# Altium PCB LED_module.PcbDoc
Units mm, origin at the board's own origin, x right, y up, seen from the top; angles counter-clockwise.
Board outline 16 x 15 mm, 2 copper layers (Top Layer, Bottom Layer); 17 components, 17 nets, 75 pads, 15 vias.
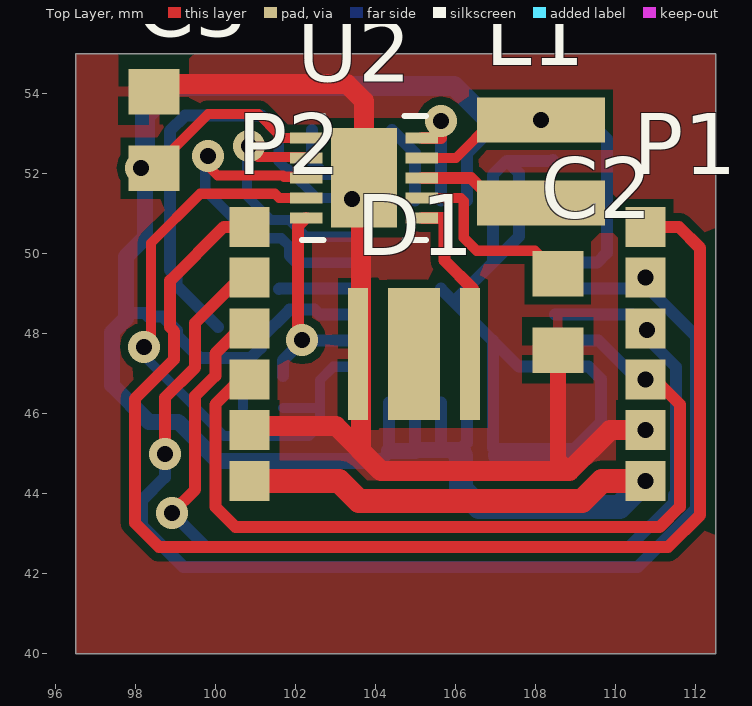
[diagram p0: Top Layer view]
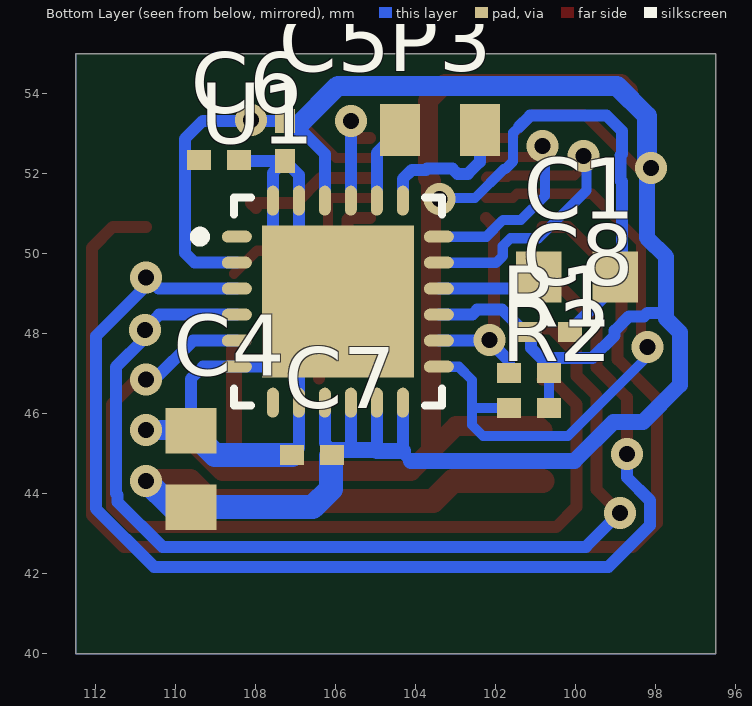
[diagram p1: Bottom Layer view, seen from below]

## Layer stack, top to bottom
Top Layer: signal copper 0.0356
Dielectric: dielectric 0.32, FR-4, Dk 4.8
Bottom Layer: signal copper 0.0356

## Board outline
96.5,55 112.5,55 112.5,40 96.5,40

## Design rules (kind name [scope] priority, off if disabled: settings)
Clearance [All] p1: gap=0.203
HoleSize [All] p1: absolutevalues=TRUE maxlimit=1 minlimit=0.3 maxpercent=80.000 minpercent=20.000
HoleToHoleClearance [All] p1: gap=0.203 allowstackedmicrovias=TRUE
MinimumSolderMaskSliver [All] p1: minsoldermaskwidth=0
PolygonConnect [All] p1: connectstyle=Relief reliefconductorwidth=0.254 reliefentries=4 polygonreliefangle="90 Angle" airgapwidth=0.254
RoutingVias [All] p1: holewidth=0.4 width=0.8 viastyle="Through Hole" minholewidth=0.3 minwidth=0.6 maxholewidth=1 maxwidth=2
SilkToSilkClearance [All] p1: silktosilkclearance=0
SilkToSolderMaskClearance [IsPad] p1: minsilkscreentomaskgap=0 clearancetoexposedcopper=TRUE
SolderMaskExpansion [All] p1: expansion=0.051
Width [All] p1: maxlimit=3 minlimit=0.254 preferedwidth=0.3
23 further rules are at their usual default settings.

## Components (designator, comment, footprint, x,y, rotation, side; value= is the part's Value field where it differs from the comment)
C1 "10u" 0805 99.975,49.425 r0 bottom
C2 "10u" 0805 108.55,48.55 r90 top
C3 "10u" 0805 98.45,53.1 r270 top
C4 "10u" 0805 109.625,44.625 r270 bottom
C5 "Cap Semi" 0402 107.275,52.825 r90 bottom
C6 "Cap Semi" 0402 108.925,52.35 r0 bottom
C7 "Cap Semi" 0402 106.6,44.975 r180 bottom
C8 "Cap Semi" 0402 100.65,48.05 r0 bottom
D1 "White" WL-SWTC_LED 104.975,47.475 r180 top
L1 "Inductor" Coil_XFL3010 108.227,52.324 r270 top
P1 "OutputConn" Goldpin6_1.27mm 110.744,48.135 r0 top
P2 "InputConn" Goldpin6_1.27mm 100.838,48.135 r0 top
P3 "Programming" GeckoProgramming 104.4,53.1 r180 bottom
R1 "Res2" 0402 101.175,47.025 r180 bottom
R2 "Res2" 0402 101.175,46.15 r180 bottom
U1 "EFM32ZG110" QFN24_5x5_0.65 105.9,48.8 r180 bottom
U2 "ADP1650" LFCSP10_3x3 103.7,51.9 r0 top

## Footprints (in the part's own frame and the unit in brackets; to place one, negate y for a bottom-side part, rotate by r counter-clockwise, add the part's x,y. Pads: shape width x height; smd on the part's side, far side on the other; paste and mask are expansions set on the pad)
0402 [mm] "Chip Capacitor, Body 1.0x0.5mm, IPC High Density"
  rect 0.6x0.5 smd: 1(-0.5,0) 2(0.5,0)
  body extent -0.55,-0.3 0.55,0.3, height 1.3
0805 [mm]
  rect 1.14x1.27 smd: 1(-0.955,0) 2(0.955,0)
Coil_XFL3010 [mm]
  rect 1.12x3.2 smd: 1(-1.025,-0.1) 2(1.05,-0.1)
GeckoProgramming [mm]
  rect 1x1.3 smd: 1(0,0) 2(2,0)
Goldpin6_1.27mm [mm]
  rect 1x1 smd: 1(0,-3.81) 2(0,-2.54) 3(0,-1.27) 4(0,0) 5(0,1.27) 6(0,2.54)
LFCSP10_3x3 [mil]
  rect 32x11.02 smd: 1(-57,39.37) 2(-57,19.68) 3(-57,0) 4(-57,-19.68) 5(-57,-39.37) 6(57,-39.37) 7(57,-19.68) 8(57,0) 9(57,19.68) 10(57,39.37)
  rect 64.96x98 smd: 11(0,0)
  silkscreen extent -61,-61 61,61
QFN24_5x5_0.65 [mm]
  oval 0.75x0.3 smd: 1(-2.575,1.631) 2(-2.575,0.981) 3(-2.575,0.331) 4(-2.575,-0.319) 5(-2.575,-0.969) 6(-2.575,-1.619) 13(2.475,-1.619) 14(2.475,-0.969) 15(2.475,-0.319) 16(2.475,0.331) 17(2.475,0.981) 18(2.475,1.631)
  oval 0.3x0.75 smd: 7(-1.675,-2.519) 8(-1.025,-2.519) 9(-0.375,-2.519) 10(0.275,-2.519) 11(0.925,-2.519) 12(1.575,-2.519) 19(1.575,2.531) 20(0.925,2.531) 21(0.275,2.531) 22(-0.375,2.531) 23(-1.025,2.531) 24(-1.675,2.531)
  rect 3.8x3.8 smd: 25(-0.05,0.006)
  silkscreen extent -3.62,-2.59 2.55,2.61, body extent -2.63,-2.57 2.53,2.58, height 1
WL-SWTC_LED [mm]
  rect 0.5x3.3 smd: 1(-1.375,-0.025) 2(1.425,-0.025)
  rect 1.3x3.3 smd: 3(0.025,-0.025)

## Part data
C1 C2 C3 C4: library part "Cap Semi", "Capacitor (Semiconductor SIM Model)"
C5 C6 C7 C8: "Capacitor (Semiconductor SIM Model)"
D1: library part LED0, "Typical INFRARED GaAs LED"
P1 P2: library part MHDR1X6, "Header, 6-Pin"
P3: library part MHDR1X2, "Header, 2-Pin"
R1 R2: "Resistor"

## Via types
v1: diameter 0.8, hole 0.4, Top Layer to Bottom Layer, 15 vias

## Nets (pads, with @x,y where several pads share a name; then routed paths per layer and width w, separated by ;. In a path a pad name is that pad's centre, name@x,y a point inside that pad or via, vN(x,y) a via of type N, cw(c..) or ccw(c..) an arc to the next point about the centre after c; other vN are vias at no path point)
+5V: P1.6 P2.6 | length 32
  Top Layer w0.3: P2.6 100.2,50.675 98.855,49.33 98.855,48.167 98.958,48.064 98.958,47.365 97.972,46.379 97.972,43.278 98.583,42.667 111.298,42.667 112.1,43.47 112.1,50.15 111.575,50.675 P1.6
GND: C1.1 C2.1 C3.1 C4.1 C5.1 C6.1 C7.1 C8.1 D1.2 P1.2 P2.2 U1.6 U1.8 U1.23 U1.24 U1.25 U2.11 | length 60.7
  Top Layer w0.4: C2.1 108.55,44.866 108.839,44.577
  Top Layer w0.5: C3.1@98.7,54.075 98.875,54.25 103.275,54.25 103.7,53.825 U2.11 103.627,51.827 103.627,45.1 ; P2.2 100.943,45.7 103,45.7 104.123,44.577 108.839,44.577 109.857,45.595 v1(110.744,45.595) P1.2@110.805,45.595
  Bottom Layer w0.254: 101.423,53.175 101.57,53.028 101.57,52.313 101.763,52.12 101.805,52.12 102.525,51.4 103.425,51.4 103.405,51.38 v1(103.405,51.378)
  Bottom Layer w0.3: C8.1@100.05,48.175 99.02,49.205 C1.1 98.85,49.595 98.85,51.81 98.881,51.841 98.881,52.465 98.85,52.495 98.85,53.075 99.231,53.456 101.142,53.456 101.423,53.175 ; U1.25@105.625,49.131 U1.25 ; C7.1 106.925,45.15 U1.8 U1.25@106.925,47.831 ; C6.1 108.4,52.325 C5.1 ; C4.1 109.625,46.875 109.319,47.181 U1.6 107.575,47.181 U1.25@106.925,47.831 ; U1.25 U1.25@106.925,49.781 ; U1.25 U1.25@106.925,47.831 ; U1.25@106.925,49.781 107.575,50.431 U1.24 107.575,52.025 C5.1 ; U1.25@106.925,49.781 U1.23 106.925,51.975 C5.1
  Bottom Layer w0.5: C4.1 109.64,45.595 v1(110.744,45.595)
  Bottom Layer w0.6: C7.1 109.02,44.975 C4.1
GPIO1: U1.17 U2.3 | length 8.5
  Top Layer w0.254: v1(99.806,52.453) 99.805,52.453 99.75,52.398 99.75,52.25 100.038,51.962 101.676,51.962 101.709,51.93 102.222,51.93 U2.3
  Bottom Layer w0.254: v1(99.806,52.453) 99.805,52.453 99.732,52.525 99.732,51.593 100.935,50.39 101.637,50.39 101.83,50.197 101.83,49.945 101.994,49.781 U1.17
GPIO2: U1.18 U2.2 | length 6
  Top Layer w0.254: v1(100.83,52.703) 100.778,52.703 100.775,52.7 101.055,52.42 102.233,52.42 U2.2
  Bottom Layer w0.254: v1@100.775,52.7 100.775,51.45 101.378,50.847 101.826,50.847 102.243,50.431 U1.18
MODCONND0: P1.5 P2.5 U1.3 | length 31.1
  Top Layer w0.3: v1(98.725,45) 98.725,46.405 99.482,47.161 99.482,48.278 100.608,49.405 P2.5 ; P1.5@110.705,49.405 v1(110.744,49.405) P1.5@110.795,49.405
  Bottom Layer w0.3: v1(98.725,45) 98.725,44.415 98.147,43.837 98.147,43.213 99.188,42.172 110.543,42.172 112,43.629 112,47.944 110.744,49.2 v1(110.744,49.405) 110.705,49.405 110.431,49.131 U1.3
MODCONND1: P1.4 P2.4 U1.4 | length 26.1
  Top Layer w0.3: v1(98.9,43.525) 99.482,44.107 99.482,46.45 99.985,46.953 99.985,47.511 100.608,48.135 P2.4 ; P1.4 v1(110.779,48.1)
  Bottom Layer w0.3: v1(98.9,43.525) 99.75,42.675 110.335,42.675 111.455,43.795 111.455,43.97 111.497,44.013 111.497,47.177 110.779,47.895 v1(110.779,48.1) 110.8,48.1 110.419,48.481 U1.4
MODCONND2: P1.3 P2.3 U1.5 | length 22.1
  Top Layer w0.3: P2.3 100.608,46.865 99.985,46.241 99.985,43.679 100.493,43.171 111.089,43.171 111.597,43.679 111.597,46.241 110.974,46.865 v1(110.744,46.865)
  Bottom Layer w0.3: U1.5 109.569,47.831 110.535,46.865 v1(110.744,46.865)
NetC1_2: C1.2 U1.16 | length 1.8
  Bottom Layer w0.3: 101.58,49.125 101.586,49.131 U1.16
NetC2_2: C2.2 U2.7 | length 4.7
  Top Layer w0.254: U2.7 106.122,51.4 106.197,51.325 106.197,50.403 106.522,50.078 107.977,50.078 C2.2
NetD1_1: D1.1 U2.6 | length 4.9
  Top Layer w0.3: U2.6 105.675,50.9 105.717,50.858 105.717,49.833 106.427,49.123 D1.1@106.427,46.888
NetL1_2: L1.2 U2.8 | length 3.4
  Top Layer w0.3: U2.8 106.375,51.9 107.001,51.274 L1.2 L1.2@108.003,51.15
NetP3_1: P3.1 U1.20 | length 2
  Bottom Layer w0.3: P3.1 104.975,52.525 U1.20
NetP3_2: P3.2 U1.19 | length 3.6
  Bottom Layer w0.3: P3.2 102.4,52.3 102.7,52 102.96,52 103.091,52.131 103.72,52.131 103.754,52.097 104.103,52.097 104.325,51.875 U1.19
SCL: R1.1 U1.14 U2.5 | length 5.4
  Top Layer w0.3: v1@102.05,47.975 102.05,50.698 U2.5
  Bottom Layer w0.3: R1.1@101.675,46.95 101.675,47.337 102.169,47.831 U1.14
  other v1: 102.155,47.852
SDA: R2.1 U1.13 U2.4 | length 16
  Top Layer w0.254: v1(98.205,47.677) 98.276,47.677 98.275,47.676 98.275,47.65 98.375,47.55 98.375,50.275 99.605,51.505 101.475,51.505 101.58,51.4 U2.4
  Bottom Layer w0.254: v1(98.205,47.677) 98.278,47.677 98.275,47.674 98.275,47.375 100.2,45.45 102.325,45.45 102.6,45.725 102.6,46.85 102.931,47.181 U1.13 ; R2.1 102.575,46.15
STROBE: U1.21 U2.10 | length 2.9
  Top Layer w0.3: U2.10 105.618,52.9 105.625,52.893 v1(105.625,53.325)
  Bottom Layer w0.3: U1.21 v1(105.625,53.325)
VCC: C3.2 C4.2 C5.2 C6.2 C7.2 C8.2 L1.1 P1.1 P2.1 R1.2 R2.2 U1.2 U1.9 U1.10 U1.11 U1.12 U1.15 U1.22 U2.1 U2.9 | length 73
  Top Layer w0.254: v1(98.128,52.153) 98.442,52.153 C3.2 99.805,53.5 101.065,53.5 101.56,53.005 101.56,52.94 101.6,52.9 U2.1 ; U2.9 106,52.4 L1.1@106.949,53.349 ; L1.1@106.674,53.349 L1.1@106.949,53.349 ; v1(108.127,53.349) L1.1@106.949,53.349
  Top Layer w0.6: P2.1 103.073,44.325 103.574,43.824 109.151,43.824 109.652,44.325 v1(110.744,44.325)
  Bottom Layer w0.254: R2.2 R1.2 100.675,47.35
  Bottom Layer w0.3: 97.747,48.45 97.825,48.528 98.212,48.528 98.304,48.437 98.678,48.437 99.033,48.082 99.033,47.957 99.59,47.4 100.875,47.4 101.125,47.65 101.125,47.888 101.843,48.606 102.467,48.606 102.592,48.481 U1.15 ; 104.125,44.825 104.325,45.025 U1.12 ; 104.975,45.1 U1.11 ; 105.625,45.1 U1.10 ; C7.2@106.175,45.1 106.175,45.175 106.275,45.275 U1.9 ; U1.22 106.275,52.5 106.975,53.2 106.957,53.2 ; 106.957,53.325 109.325,53.325 109.775,52.875 109.775,50.025 109.531,49.781 U1.2
  Bottom Layer w0.4: v1@98.225,51.92 98.225,50.405 97.747,49.927 97.747,48.45 97.747,48.383 97.402,48.037 97.402,46.723 98.322,45.803 99.058,45.803 100.036,44.825 104.125,44.825 ; 104.325,45.075 104.975,45.075 ; 104.975,45.1 105.625,45.1 C7.2@106.175,45.1
  Bottom Layer w0.5: v1@98.225,52.388 98.225,53.45 98.978,54.203 105.953,54.203 106.957,53.2
  Bottom Layer w0.6: C7.2 106.125,44.95 106.125,44.125 106.58,43.67 C4.2 110.089,43.67 v1(110.744,44.325)
pads on no net: D1.3 U1.1 U1.7

## Polygon pours and split planes (outlines as drawn)
GND on Top Layer "Top Layer-No Net" (solid, pour order 4): 96.5,55 112.5,55 112.5,40 96.5,40
GND on Bottom Layer "Top Layer-No Net" (solid, shelved, pour order 6): 96.5,55 112.5,55 112.5,40 96.5,40

## Dimensions
112.5,55 to 96.5,55 on Mechanical 1